# Altium PCB EEG_PCB.PcbDoc (part 1 of 2)
Units mm, origin at the board's own origin, x right, y up, seen from the top; angles counter-clockwise.
Board outline 44 x 34 mm, 4 copper layers (Top Layer, Internal Plane 1, Internal Plane 2, Bottom Layer), stack 0.778 mm thick; 60 components, 61 nets, 284 pads, 106 vias.
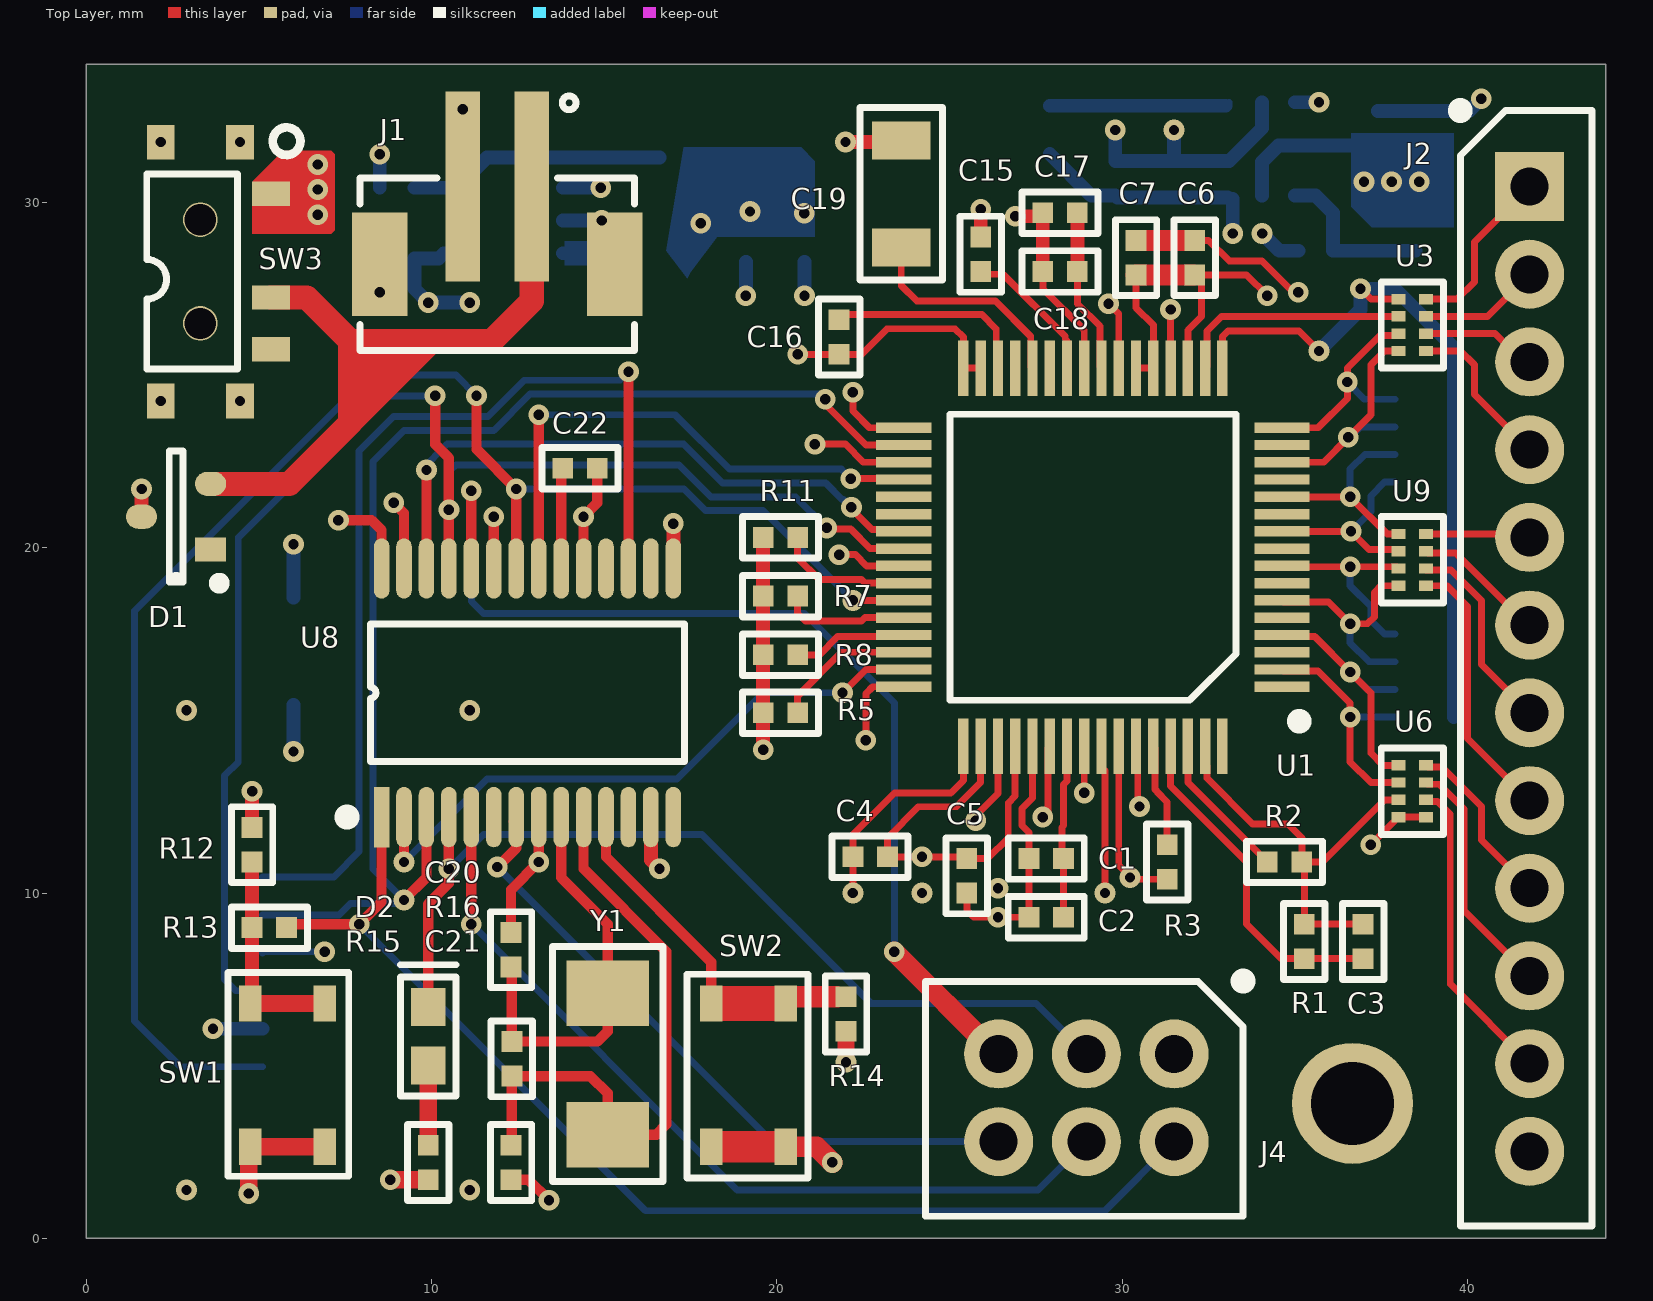
[diagram p0: Top Layer view]
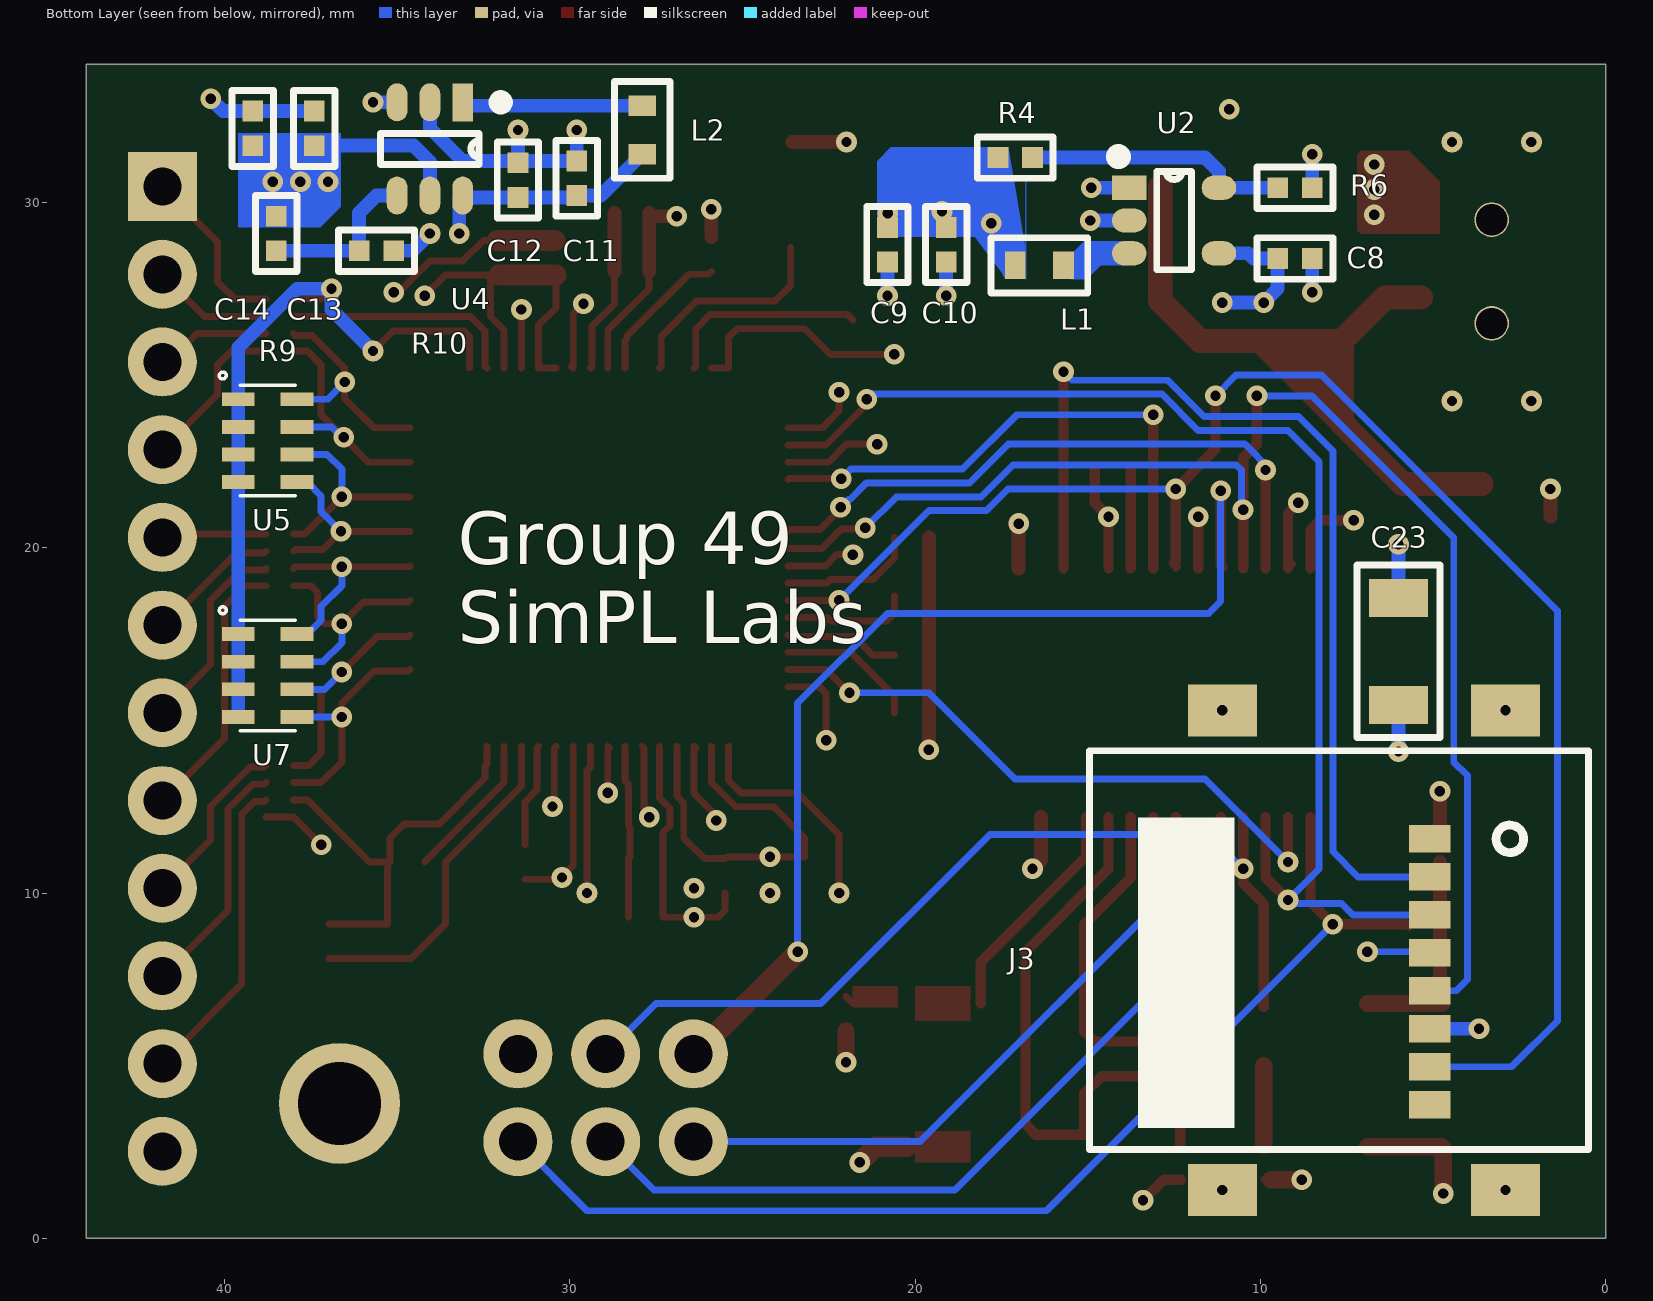
[diagram p1: Bottom Layer view, seen from below]
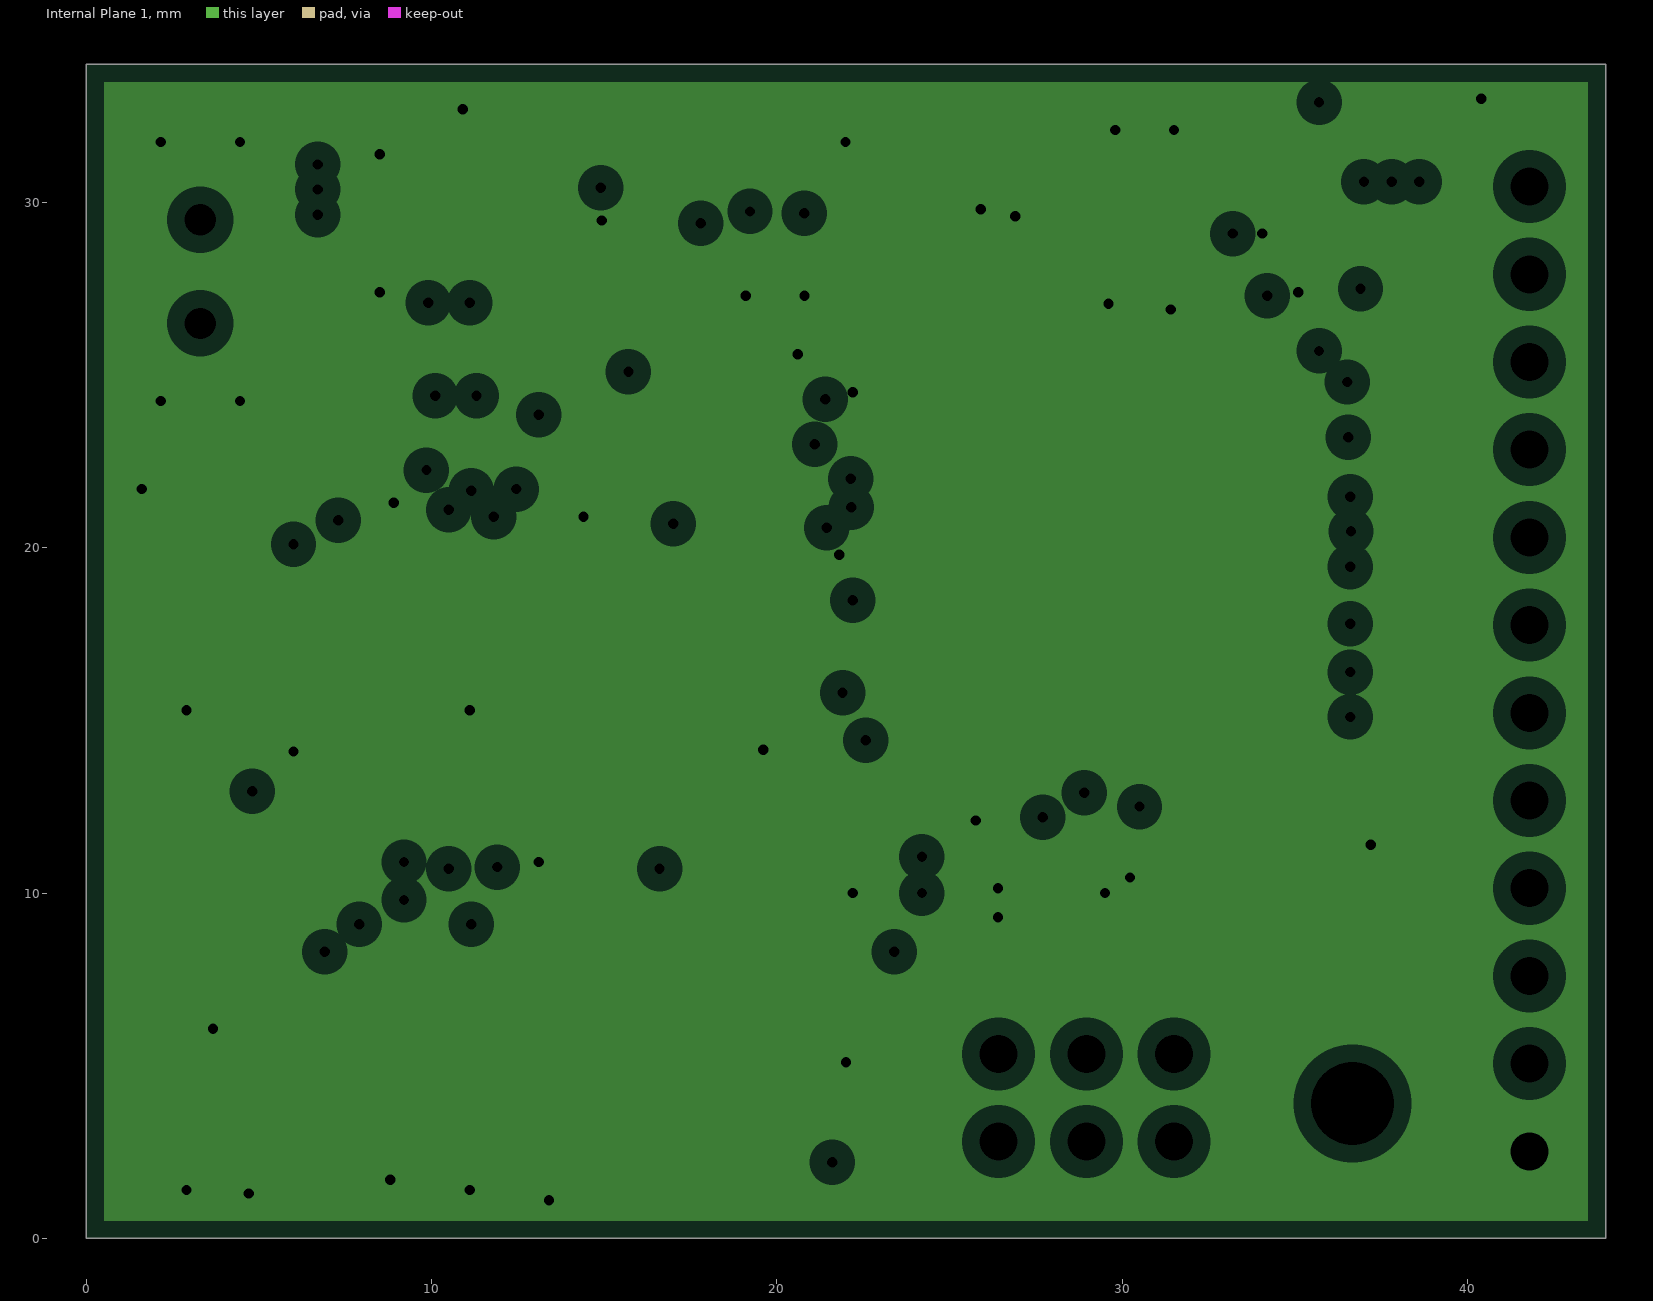
[diagram p2: Internal Plane 1, clearances drawn from the general rule]
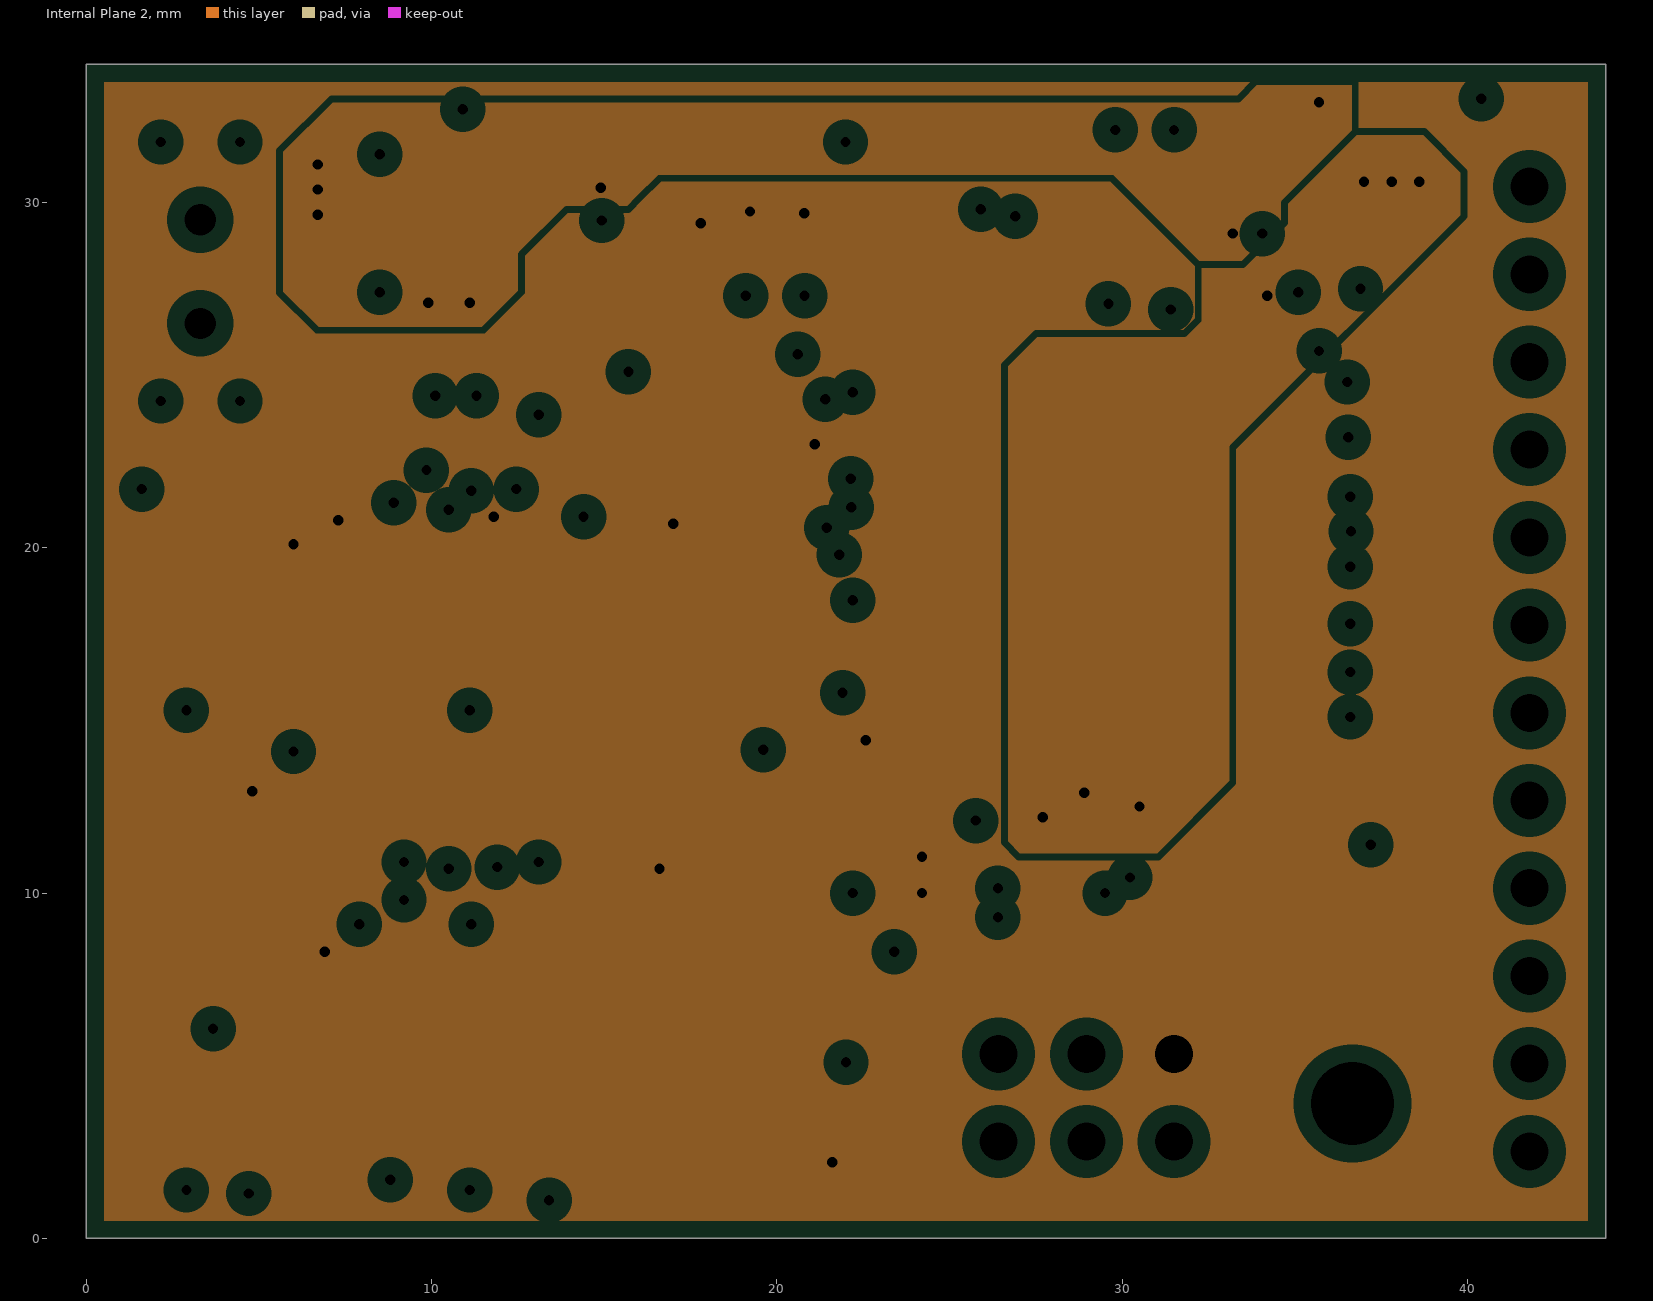
[diagram p3: Internal Plane 2, clearances drawn from the general rule]

## Layer stack, top to bottom
Top Solder: solder mask 0.0102, Solder Resist, Dk 3.5
Top Layer: signal copper 0.0356
Dielectric 1: core 0.254, FR-4, Dk 4.2
Internal Plane 1: plane copper 0.036, net GND
Dielectric 3: prepreg 0.127, Dk 4.2
Internal Plane 2: plane copper 0.036, net 3V3
Dielectric 2: core 0.254, Dk 4.2
Bottom Layer: signal copper 0.0356
Bottom Solder: solder mask 0.0102, Solder Resist, Dk 3.5

## Board outline
0,0 0,34 44,34 44,0

## Design rules (kind name [scope] priority, off if disabled: settings)
Clearance [All] p1: gap=0.2 ignorepadtopadclearanceinfootprint=FALSE
MinimumSolderMaskSliver [All] p1: minsoldermaskwidth=0.01
PlaneClearance [All] p1: clearance=0.508
PlaneConnect [All] p1: planeconnectstyle=Relief reliefexpansion=0.508 reliefentries=4 reliefconductorwidth=0.254 reliefairgap=0.254
PolygonConnect [All] p1: connectstyle=Relief reliefconductorwidth=0.254 reliefentries=4 polygonreliefangle="90 Angle" airgapwidth=0.254
RoutingVias [All] p1: holewidth=0.3 width=0.6 viastyle="Through Hole" minholewidth=0.3 minwidth=0.6 maxholewidth=0.3 maxwidth=0.6
SilkToSilkClearance [All] p1: silktosilkclearance=0.2
SilkToSolderMaskClearance [IsPad] p1: minsilkscreentomaskgap=0.1 clearancetoexposedcopper=TRUE
SolderMaskExpansion [All] p1: expansion=0.102
Width [All] p1: maxlimit=1 minlimit=0.2 preferedwidth=0.2
25 further rules are at their usual default settings.

## Components (designator, comment, footprint, x,y, rotation, side; value= is the part's Value field where it differs from the comment)
C1 "1uF_Cap" 0402RESISTOR 27.8,11 r0 top value=1uF
C2 "0.1uF_Cap" 0402RESISTOR 27.8,9.3 r0 top value=0.1uF
C3 "1.5nF_Cap" 0402RESISTOR 36.975,8.6 r90 top value=1.5nF
C4 "1uF_Cap" 0402RESISTOR 22.7,11.05 r0 top value=1uF
C5 "0.1uF_Cap" 0402RESISTOR 25.5,10.5 r90 top value=0.1uF
C6 "1uF_Cap" 0402RESISTOR 32.1,28.4 r270 top value=1uF
C7 "0.1uF_Cap" 0402RESISTOR 30.4,28.4 r270 top value=0.1uF
C8 "4.7uF_Cap" 0402RESISTOR 9,28.377 r0 bottom value=4.7uF
C9 "10uF_Cap" 0402RESISTOR 20.8,28.777 r90 bottom value=10uF
C10 "0.1uF_Cap" 0402RESISTOR 19.1,28.777 r90 bottom value=0.1uF
C11 "10uF_Cap" 0402RESISTOR 29.8,30.7 r270 bottom value=10uF
C12 "0.1uF_Cap" 0402RESISTOR 31.5,30.646 r270 bottom value=0.1uF
C13 "4.7uF_Cap" 0402RESISTOR 37.4,32.146 r270 bottom value=4.7uF
C14 "4.7uF_Cap" 0402RESISTOR 39.18,32.146 r270 bottom value=4.7uF
C15 "1uF_Cap" 0402RESISTOR 25.9,28.5 r270 top value=1uF
C16 "1uF_Cap" 0402RESISTOR 21.8,26.1 r90 top value=1uF
C17 "10uF_Cap" 0402RESISTOR 28.2,29.7 r180 top value=10uF
C18 "0.1uF_Cap" 0402RESISTOR 28.2,28 r180 top value=0.1uF
C19 "100uF_Cap" 1206RESISTOR 23.6,30.25 r270 top value=100uF
C20 "18pF_Cap" 0402RESISTOR 12.3,8.36 r270 top value=18pF
C21 "18pF_Cap" 0402RESISTOR 12.3,2.2 r90 top value=18pF
C22 "10uF_Cap" 0402RESISTOR 14.3,22.3 r180 top value=10uF
C23 "100uF_Cap" 1206RESISTOR 6,17 r90 bottom value=100uF
D1 "TVS 4.0 VRWM" SOT23-3_TVS 3.6,19.95 r180 top
D2 "LED1" LED 9.9,5.85 r270 top
J1 "CONN HEADER SMD 2POS 2MM" Battery_Conn 11.9,30.46 r180 top
J2 "CONN HEADER VERT 2X6 2.54MM" HDR1X12 41.8,30.46 r0 top
J3 "MICROSD CONNECTOR" SD_Conn 14.95,1.545 r90 bottom
J4 "CONN HEADER VERT 6POS 2.54MM" 6PIN_HEADER 31.5,5.34 r270 top
L1 "2_2uH_Inductor" 0603INDUCTOR 16.4,28.177 r0 bottom value=2.2uH
L2 "4_7uH_Inductor" 0603INDUCTOR 27.9,32.1 r90 bottom value=4.7uH
R1 "1M_Res" 0402RESISTOR 35.275,8.6 r90 top value=1M
R2 "0_Res" 0402RESISTOR 34.7,10.9 r0 top value=0R
R3 "0_Res" 0402RESISTOR 31.3,10.9 r270 top value=0R
R4 "453k_Res" 0402RESISTOR 17.1,31.3 r0 bottom value=453k
R5 "100k_Res" 0402RESISTOR 20.1,15.22 r180 top value=100k
R6 "100k_Res" 0402RESISTOR 9,30.427 r0 bottom value=100k
R7 "100k_Res" 0402RESISTOR 20.1,18.6 r180 top value=100k
R8 "100k_Res" 0402RESISTOR 20.1,16.9 r180 top value=100k
R9 "1_6M_Res" 0402RESISTOR 38.5,29.1 r90 bottom value=1.6M
R10 "180k_Res" 0402RESISTOR 35.6,28.6 r0 bottom value=180k
R11 "100k_Res" 0402RESISTOR 20.1,20.3 r0 top value=100k
R12 "10k_Res" 0402RESISTOR 4.8,11.4 r90 top value=10k
R13 "1k_Res" 0402RESISTOR 5.3,9 r180 top value=1k
R14 "470k_Res" 0402RESISTOR 22,6.5 r90 top value=470k
R15 "1k_Res" 0402RESISTOR 9.9,2.2 r90 top value=1k
R16 "1M_Res" 0402RESISTOR 12.325,5.2 r90 top value=1M
SW1 "SWITCH TACTILE SPST-NO 0.05A 16V" BasicTwoPinSwitch 6.9,6.8 r270 top
SW2 "SWITCH TACTILE SPST-NO 0.05A 16V" BasicTwoPinSwitch 18.1,2.65 r90 top
SW3 "MINI SPDT SWITCH" SW_SPDT 2.275,24.025 r90 top
U1 "ADS1299IPAGR AFE" 64-TQFP 34.625,15.975 r180 top
U2 "AP3417C BUCK" SOT23_BUCK 13.8,30.427 r180 bottom
U3 "RES ARRAY 4 RES 1.6K OHM 0804" Rarray 38.4,27.2 r0 top
U4 "TPS61073 Boost" SOT23-6 33.1,32.9 r270 bottom
U5 "CAP ARRAY 1000PF 50V X7R 0612" Cap_array 38.75,23.1 r180 bottom
U6 "RES ARRAY 4 RES 1.6K OHM 0804" Rarray 38.4,13.7 r0 top
U7 "CAP ARRAY 1000PF 50V X7R 0612" Cap_array 38.75,16.3 r180 bottom
U8 "PIC32MX250F128B MCU" SSOP28 8.55,12.2 r90 top
U9 "RES ARRAY 4 RES 1.6K OHM 0804" Rarray 38.4,20.4 r0 top
Y1 "XTAL" 3X5MM_XTAL 15.1,5.05 r270 top

## Footprints (in the part's own frame and the unit in brackets; to place one, negate y for a bottom-side part, rotate by r counter-clockwise, add the part's x,y. Pads: shape width x height; smd on the part's side, far side on the other; paste and mask are expansions set on the pad)
3X5MM_XTAL [mm]
  rect 1.9x2.4 smd: 1(-2.05,0) 2(2.05,0)
  silkscreen extent -3.4,-1.6 3.4,1.6
6PIN_HEADER [mm]
  round 2 hole 1.1: 1(0,0) 2(2.54,0) 3(0,-2.54) 4(2.54,-2.54) 5(0,-5.08) 6(2.54,-5.08)
  silkscreen extent -2.12,-7.2 4.7,2.01
64-TQFP [mm]
  rect 1.6x0.3 smd mask+0.05: 1(0,0) 2(0,-0.5) 3(0,-1) 4(0,-1.5) 5(0,-2) 6(0,-2.5) 7(0,-3) 8(0,-3.5) 9(0,-4) 10(0,-4.5) 11(0,-5) 12(0,-5.5) 13(0,-6) 14(0,-6.5) 15(0,-7) 16(0,-7.5) 33(10.95,-7.5) 34(10.95,-7) 35(10.95,-6.5) 36(10.95,-6) 37(10.95,-5.5) 38(10.95,-5) 39(10.95,-4.5) 40(10.95,-4) 41(10.95,-3.5) 42(10.95,-3) 43(10.95,-2.5) 44(10.95,-2) 45(10.95,-1.5) 46(10.95,-1) 47(10.95,-0.5) 48(10.95,0)
  rect 0.3x1.6 smd mask+0.05: 17(1.725,-9.225) 18(2.225,-9.225) 19(2.725,-9.225) 20(3.225,-9.225) 21(3.725,-9.225) 22(4.225,-9.225) 23(4.725,-9.225) 24(5.225,-9.225) 25(5.725,-9.225) 26(6.225,-9.225) 27(6.725,-9.225) 28(7.225,-9.225) 29(7.725,-9.225) 30(8.225,-9.225) 31(8.725,-9.225) 32(9.225,-9.225) 49(9.225,1.725) 50(8.725,1.725) 51(8.225,1.725) 52(7.725,1.725) 53(7.225,1.725) 54(6.725,1.725) 55(6.225,1.725) 56(5.725,1.725) 57(5.225,1.725) 58(4.725,1.725) 59(4.225,1.725) 60(3.725,1.725) 61(3.225,1.725) 62(2.725,1.725) 63(2.225,1.725) 64(1.725,1.725)
  silkscreen extent -0.51,-7.89 9.61,1.01, body extent -0.6,-9.9 11.6,2.3, height 1.2
0402RESISTOR [mm]
  rect 0.6x0.6 smd mask+0.08: 1(-0.5,0) 2(0.5,0)
  silkscreen extent -1.1,-0.6 1.1,0.6
0603INDUCTOR [mm]
  rect 0.6x0.8 smd: 1(-0.7,0) 2(0.7,0)
  silkscreen extent -1.4,-0.8 1.4,0.8
1206RESISTOR [mm]
  rect 1.1x1.7 smd: 1(-1.55,0) 2(1.55,0)
  silkscreen extent -2.5,-1.2 2.5,1.2
BasicTwoPinSwitch [mm]
  rect 1.05x0.65 smd: 1(0,0) 2(0,-2.15) 3(4.15,-2.15) 4(4.15,0)
  silkscreen extent -0.9,-2.8 5,0.7, body extent -0.25,-2.65 4.35,0.55, height 2.71
Battery_Conn [mm]
  rect 1x5.5 smd: 1(-1,0) 2(1,0)
  rect 1.6x3 smd: 3(-3.4,2.25) 4(3.4,2.25)
  silkscreen extent -3.98,-2.62 3.98,4.75, body extent -3.98,-2.25 3.97,4.75, height 6.61
Cap_array [mm]
  rect 0.95x0.4 smd: 1(-0.85,1.2) 3(-0.85,-0.4) 4(-0.85,-1.2) 5(0.85,-1.2) 6(0.85,-0.4) 7(0.85,0.4) 8(0.85,1.2)
  rect 0.95x0.4 smd mask+0.102: 2(-0.85,0.4)
  silkscreen extent -1.4,-1.6 0.8,1.99
HDR1X12 [mm]
  rect 2x2 hole 1.1: 1(0,0)
  round 2 hole 1.1: 2(0,-2.54) 3(0,-5.08) 4(0,-7.62) 5(0,-10.16) 6(0,-12.7) 7(0,-15.24) 8(0,-17.78) 9(0,-20.32) 10(0,-22.86) 11(0,-25.4) 12(0,-27.94)
  silkscreen extent -2.02,-30.1 1.8,2.21
LED [mm]
  rect 1.1x1 smd: 1(-0.85,0) 2(0.85,0)
  silkscreen extent -2.07,-0.8 1.73,0.8, body extent -0.8,-0.4 0.8,0.4, height 0.66
Rarray [mm]
  rect 0.4x0.3 smd mask+0.05: 1(-0.4,0) 2(-0.4,-0.5) 3(-0.4,-1) 4(-0.4,-1.5) 5(0.4,-1.5) 6(0.4,-1) 7(0.4,-0.5) 8(0.4,0)
  silkscreen extent -0.9,-2 0.9,0.5, body extent -0.5,-1.75 0.5,0.25, height 0.56
SD_Conn [mm]
  rect 0.8x1.2 smd: 1(10.025,-9.85) 2(8.925,-9.85) 3(7.825,-9.85) 4(6.725,-9.85) 5(5.625,-9.85) 6(4.525,-9.85) 7(3.425,-9.85) 8(2.325,-9.85)
  rect 1.5x2 smd: 9(-0.145,-12.05) 10(-0.145,-3.85) 11(13.745,-3.85) 12(13.745,-12.05)
  silkscreen extent 1.02,-14.45 12.57,0, body extent 7,-6.8 7,-6.8, height 0.25
SOT23-3_TVS [mm]
  rect 0.9x0.7 smd: 1(0,0)
  oval 0.9x0.7 smd: 2(0,-1.9) 3(2,-0.95)
  silkscreen extent -0.3,-2.85 1.2,1.02
SOT23-6 [mm]
  rect 1.1x0.6 smd: 1(0,0)
  oval 1.1x0.6 smd: 2(0,-0.95) 3(0,-1.9) 4(2.7,-1.9) 5(2.7,-0.95) 6(2.7,0)
  silkscreen extent -0.1,-2.38 1.8,1.2, body extent 0.15,-2.35 2.57,0.44, height 1.09
SOT23_BUCK [mm]
  rect 1x0.7 smd mask+0.08: 1(0,0)
  oval 1x0.7 smd mask+0.08: 2(0,-0.95) 3(0,-1.9) 4(2.6,-1.9) 5(2.6,0)
  silkscreen extent -0.32,-2.38 1.8,0.91
SSOP28 [mm]
  rect 1.75x0.45 smd mask+0.05: 1(0,0)
  oval 1.75x0.45 smd mask+0.05: 2(0,-0.65) 3(0,-1.3) 4(0,-1.95) 5(0,-2.6) 6(0,-3.25) 7(0,-3.9) 8(0,-4.55) 9(0,-5.2) 10(0,-5.85) 11(0,-6.5) 12(0,-7.15) 13(0,-7.8) 14(0,-8.45) 15(7.2,-8.45) 16(7.2,-7.8) 17(7.2,-7.15) 18(7.2,-6.5) 19(7.2,-5.85) 20(7.2,-5.2) 21(7.2,-4.55) 22(7.2,-3.9) 23(7.2,-3.25) 24(7.2,-2.6) 25(7.2,-1.95) 26(7.2,-1.3) 27(7.2,-0.65) 28(7.2,0)
  silkscreen extent -0.01,-8.78 5.59,1.01, body extent -0.5,-9.44 7.7,1.05, height 2.01
SW_SPDT [mm]
  rect 0.7x1.1 smd: 1(6.225,-3.075) 2(3.225,-3.075) 3(1.725,-3.075)
  rect 1x0.8 smd: 4(0.225,-2.175) 5(0.225,0.125) 6(7.725,0.125) 7(7.725,-2.175)
  round 1 hole 0.9 unplated: 8(2.475,-1.025) 9(5.475,-1.025)
  silkscreen extent 1.15,-3.93 8.15,0.53, body extent 0.15,-3.27 7.85,1.86, height 1.4

## Part data
C1 C4 C6 C15 C16: "0402 Cap 1uF", Capacitance=1uF, Case/Package=0402, Case Code (Metric)=1005, Dielectric=X5R, Manufacturer=Murata, Manufacturer Part Number=GRM153R61A105ME95D, Max Operating Temperature=85°C, Min Operating Temperature=-55°C, Package Quantity=10000, Supplier Part Number 1=490-14577-6-ND, Tolerance=20%, Voltage Rating=10V, Case Code (Imperial)=0402, ComponentLink1Description=http://www.farnell.com/datasheets/1666664.pdf?src-supplier=Element14, ComponentLink1URL=http://www.farnell.com/datasheets/1666664.pdf?src-supplier=Element14, Composition=Ceramic, Height=0.3mm, Length=1mm, Material=Ceramic, Mount="Surface Mount", Packaging="Tape and Reel", Pricing 1="1=0.19, 10=0.131, 100=0.0663, 500=0.04538, 1000=0.04015, 2500=0.0384, 5000=0.03491 (USD)", REACH SVHC="No SVHC", Stock 1=43822, Supplier 1=Digi-Key, Termination=SMD/SMT, Thickness=0.013inch, Voltage Rating (DC)=10V, Weight=0.000212oz, Width=0.5mm
C2 C5 C7 C10 C12 C18: "0402 Cap 0.1uF", Capacitance=100nF, Case/Package=0402, Case Code (Metric)=1005, Dielectric=X5R, Manufacturer=Samsung, Manufacturer Part Number=CL05A104KP5NNNC, Max Operating Temperature=85°C, Min Operating Temperature=-55°C, Supplier Part Number 1=1276-1022-6-ND, Tolerance=10%, Voltage Rating=10V, Case Code (Imperial)=0402, ComponentLink1Description=https://media.digikey.com/pdf/Data%20Sheets/Samsung%20PDFs/CL_Series_MLCC_ds.pdf?src-supplier=Digi-Key, ComponentLink1URL=https://media.digikey.com/pdf/Data%20Sheets/Samsung%20PDFs/CL_Series_MLCC_ds.pdf?src-supplier=Digi-Key, ComponentLink2Description=https://www.verical.com/server-webapp/html/getDatasheet?partID=358611&src-supplier=Verical, ComponentLink2URL=https://www.verical.com/server-webapp/html/getDatasheet?partID=358611&src-supplier=Verical, ComponentLink3Description=http://www1.futureelectronics.com/doc/SAMSUNG%20PASSIVE/CL05B104KQ5NNNC.pdf?src-supplier=Future+Electronics, ComponentLink3URL=http://www1.futureelectronics.com/doc/SAMSUNG%20PASSIVE/CL05B104KQ5NNNC.pdf?src-supplier=Future+Electronics, ComponentLink4Description=https://www.distrelec.biz/Web/Downloads/_e/ng/MLCC_CatalogDownload2013_ENG.pdf?mime=application%2Fpdf&src-supplier=Distrelec, ComponentLink4URL=https://www.distrelec.biz/Web/Downloads/_e/ng/MLCC_CatalogDownload2013_ENG.pdf?mime=application%2Fpdf&src-supplier=Distrelec, Contact Plating=Tin, Depth=0.5mm, Height=0.5mm, Length=1mm, Mount="Surface Mount", Packaging="Tape and Reel", Pricing 1="1=0.1, 10=0.025, 100=0.0111, 500=0.00794, 1000=0.00624, 2500=0.00568, 5000=0.00522 (USD)", Radiation Hardening=No, Stock 1=12307534, Supplier 1=Digi-Key, Thickness=0.022inch, Width=0.02inch
C3: "0402 Cap 1.5nF", Capacitance=1.5nF, Case/Package=0402, Case Code (Metric)=1005, Dielectric=X7R, Manufacturer=Samsung, Manufacturer Part Number=CL05B152KB5NNNC, Max Operating Temperature=125°C, Min Operating Temperature=-55°C, Package Quantity=1, Supplier Part Number 1=1276-1521-6-ND, Tolerance=10%, Voltage=50V, Case Code (Imperial)=0402, ComponentLink1Description=https://www.verical.com/server-webapp/html/getDatasheet?partID=543173&src-supplier=Verical, ComponentLink1URL=https://www.verical.com/server-webapp/html/getDatasheet?partID=543173&src-supplier=Verical, ComponentLink2Description=http://www1.futureelectronics.com/doc/SAMSUNG/CL05B152KB5NNNC.pdf?src-supplier=Future+Electronics, ComponentLink2URL=http://www1.futureelectronics.com/doc/SAMSUNG/CL05B152KB5NNNC.pdf?src-supplier=Future+Electronics, ComponentLink3Description=https://www.distrelec.biz/Web/Downloads/_e/ng/MLCC_CatalogDownload2013_ENG.pdf?mime=application%2Fpdf&src-supplier=Distrelec, ComponentLink3URL=https://www.distrelec.biz/Web/Downloads/_e/ng/MLCC_CatalogDownload2013_ENG.pdf?mime=application%2Fpdf&src-supplier=Distrelec, ComponentLink4Description=https://produktinfo.conrad.com/datenblaetter/450000-474999/459134-da-01-en-VS_KONDENSATOR_0402.pdf?src-supplier=Conrad, ComponentLink4URL=https://produktinfo.conrad.com/datenblaetter/450000-474999/459134-da-01-en-VS_KONDENSATOR_0402.pdf?src-supplier=Conrad, Contact Plating=Tin, Depth=0.5mm, Height=0.5mm, Length=1mm, Material=Ceramic, Mount="Surface Mount", Packaging="Tape and Reel", Pricing 1="1=0.1, 10=0.023, 100=0.0101, 500=0.0072, 1000=0.00566, 2500=0.00514, 5000=0.00473 (USD)", Radiation Hardening=No, Stock 1=658330, Supplier 1=Digi-Key, Thickness=0.022inch, Voltage Rating=50V, Width=0.02inch
C8 C13 C14: "0402 Cap 4.7uF", Capacitance=4.7uF, Case/Package=0402, Case Code (Metric)=1005, Manufacturer=Murata, Manufacturer Part Number=GRM155R61A475MEAAD, Max Operating Temperature=85°C, Min Operating Temperature=-55°C, Supplier Part Number 1=490-14306-6-ND, Tolerance=20%, Voltage Rating=10V, Case Code (Imperial)=0402, ComponentLink1Description=http://www.farnell.com/datasheets/2189109.pdf?src-supplier=Farnell, ComponentLink1URL=http://www.farnell.com/datasheets/2189109.pdf?src-supplier=Farnell, ComponentLink2Description=https://search.murata.co.jp/Ceramy/image/img/A01X/G101/ENG/GRM155R61A475MEAA-01.pdf?src-supplier=Digi-Key, ComponentLink2URL=https://search.murata.co.jp/Ceramy/image/img/A01X/G101/ENG/GRM155R61A475MEAA-01.pdf?src-supplier=Digi-Key, ComponentLink3Description=http://www.farnell.com/datasheets/2189109.pdf?src-supplier=Element14, ComponentLink3URL=http://www.farnell.com/datasheets/2189109.pdf?src-supplier=Element14, ComponentLink4Description=http://www.farnell.com/datasheets/2189109.pdf?src-supplier=Newark, ComponentLink4URL=http://www.farnell.com/datasheets/2189109.pdf?src-supplier=Newark, ComponentLink5Description=http://datasheet.octopart.com/GRM155R61A475MEAAD-Murata-datasheet-138740730.pdf?src-supplier=Ciiva+Crawler, ComponentLink5URL=http://datasheet.octopart.com/GRM155R61A475MEAAD-Murata-datasheet-138740730.pdf?src-supplier=Ciiva+Crawler, ComponentLink6Description=http://datasheet.octopart.com/GRM155R61A475MEAAD-Murata-datasheet-68589269.pdf?src-supplier=Newark, ComponentLink6URL=http://datasheet.octopart.com/GRM155R61A475MEAAD-Murata-datasheet-68589269.pdf?src-supplier=Newark, ComponentLink7Description=http://datasheet.octopart.com/GRM155R61A475MEAAD-Murata-datasheet-8819587.pdf, ComponentLink7URL=http://datasheet.octopart.com/GRM155R61A475MEAAD-Murata-datasheet-8819587.pdf, ComponentLink8Description=http://datasheet.octopart.com/GRM155R61A475MEAAD-Murata-datasheet-10025737.pdf, ComponentLink8URL=http://datasheet.octopart.com/GRM155R61A475MEAAD-Murata-datasheet-10025737.pdf, ComponentLink9Description=http://datasheet.octopart.com/GRM155R61A475MEAAD-Murata-datasheet-11978611.pdf, ComponentLink9URL=http://datasheet.octopart.com/GRM155R61A475MEAAD-Murata-datasheet-11978611.pdf, ComponentLink10Description=http://datasheet.octopart.com/GRM155R61A475MEAAD-Murata-datasheet-12510076.pdf, ComponentLink10URL=http://datasheet.octopart.com/GRM155R61A475MEAAD-Murata-datasheet-12510076.pdf, ComponentLink11Description=http://datasheet.octopart.com/GRM155R61A475MEAAD-Murata-datasheet-12515295.pdf, ComponentLink11URL=http://datasheet.octopart.com/GRM155R61A475MEAAD-Murata-datasheet-12515295.pdf, Mount="Surface Mount", Packaging="Tape and Reel", Pricing 1="1=0.25, 10=0.169, 100=0.0856, 500=0.05854, 1000=0.05179, 2500=0.04954, 5000=0.04503 (USD)", Stock 1=848000, Supplier 1=Digi-Key
C9 C11 C17 C22: "0402 Cap 10uF", Capacitance=10uF, Case/Package=0402, Case Code (Metric)=1005, Dielectric=X5R, Manufacturer=Samsung, Manufacturer Part Number=CL05A106MP5NUNC, Max Operating Temperature=85°C, Min Operating Temperature=-55°C, Package Quantity=1, Supplier Part Number 1=1276-1450-6-ND, Tolerance=20%, Voltage Rating=10V, Case Code (Imperial)=0402, ComponentLink1Description=https://media.digikey.com/pdf/Data%20Sheets/Samsung%20PDFs/CL_Series_MLCC_ds.pdf?src-supplier=Digi-Key, ComponentLink1URL=https://media.digikey.com/pdf/Data%20Sheets/Samsung%20PDFs/CL_Series_MLCC_ds.pdf?src-supplier=Digi-Key, ComponentLink2Description=https://www.verical.com/server-webapp/html/getDatasheet?partID=745310&src-supplier=Verical, ComponentLink2URL=https://www.verical.com/server-webapp/html/getDatasheet?partID=745310&src-supplier=Verical, Contact Plating=Tin, Depth=0.5mm, Lead Free="Lead Free", Length=1mm, Mount="Surface Mount", Packaging="Tape and Reel", Pricing 1="1=0.42, 10=0.295, 100=0.1943, 500=0.14392, 1000=0.12233, 2500=0.11514, 5000=0.10794 (USD)", Radiation Hardening=No, Stock 1=3276370, Supplier 1=Digi-Key, Termination=Wraparound, Thickness=0.028inch, Width=0.02inch
C19 C23: "1206 Cap 100uF", Capacitance=100uF, Case/Package=1206, Case Code (Metric)=3216, Dielectric=X5R, Manufacturer=Murata, Manufacturer Part Number=GRM31CR60J107ME39L, Max Operating Temperature=85°C, Min Operating Temperature=-55°C, Package Quantity=1, Supplier Part Number 1=490-4539-6-ND, Tolerance=20%, Voltage=6.3V, Case Code (Imperial)=1206, ComponentLink1Description=http://uk.rs-online.com/webdocs/1388/0900766b813885c5.pdf?src-supplier=RSComponents, ComponentLink1URL=http://uk.rs-online.com/webdocs/1388/0900766b813885c5.pdf?src-supplier=RSComponents, ComponentLink2Description=http://components.arrow.com/part/dataview/42788059S8888100N2606?src-supplier=Arrow, ComponentLink2URL=http://components.arrow.com/part/dataview/42788059S8888100N2606?src-supplier=Arrow, ComponentLink3Description=http://www.mouser.com/ds/2/281/c02e-2905.pdf?src-supplier=Mouser, ComponentLink3URL=http://www.mouser.com/ds/2/281/c02e-2905.pdf?src-supplier=Mouser, ComponentLink4Description=https://www.murata.com/~/media/webrenewal/support/library/catalog/products/capacitor/mlcc/c02e.ashx?la=en-us&src-supplier=Digi-Key, ComponentLink4URL=https://www.murata.com/~/media/webrenewal/support/library/catalog/products/capacitor/mlcc/c02e.ashx?la=en-us&src-supplier=Digi-Key, ComponentLink5Description=http://psearch.murata.com/capacitor/product/GRM31CF51A226ZE01%23.pdf?src-supplier=Future+Electronics, ComponentLink5URL=http://psearch.murata.com/capacitor/product/GRM31CF51A226ZE01%23.pdf?src-supplier=Future+Electronics, ComponentLink6Description=https://www.distrelec.biz/Web/Downloads/_t/ds/murata_MLCC_eng_tds.pdf?mime=application%2Fpdf&src-supplier=Distrelec, ComponentLink6URL=https://www.distrelec.biz/Web/Downloads/_t/ds/murata_MLCC_eng_tds.pdf?mime=application%2Fpdf&src-supplier=Distrelec, ComponentLink7Description=http://www.produktinfo.conrad.com/datenblaetter/450000-474999/454804-da-01-en-VS_KONDENSATOR_1206.pdf?src-supplier=Conrad, ComponentLink7URL=http://www.produktinfo.conrad.com/datenblaetter/450000-474999/454804-da-01-en-VS_KONDENSATOR_1206.pdf?src-supplier=Conrad, ComponentLink8Description=http://www.produktinfo.conrad.com/datenblaetter/450000-474999/451152-da-01-de-VS_CHIP_KOND_1206_100_0_UF_20Pr_6_3V_X5R.pdf?src-supplier=Conrad, ComponentLink8URL=http://www.produktinfo.conrad.com/datenblaetter/450000-474999/451152-da-01-de-VS_CHIP_KOND_1206_100_0_UF_20Pr_6_3V_X5R.pdf?src-supplier=Conrad, Depth=1.6mm, Height=1.6mm, Lead Free="Lead Free", Length=3.2mm, Material=Ceramic, Mount="Surface Mount", Packaging="Tape and Reel", Pricing 1="1=1.08, 10=0.852, 100=0.6386, 500=0.48254, 1000=0.42577 (USD)", Radiation Hardening=No, REACH SVHC="No SVHC", Stock 1=1307168, Supplier 1=Digi-Key, Termination=SMD/SMT, Thickness=0.071inch, Voltage Rating=6.3V, Voltage Rating (DC)=6.3V, Width=1.6mm
C20 C21: "0402 Cap 18pF", Manufacturer=KEMET, Manufacturer Part Number=C0402C180K5RAC7867, Supplier Part Number 1=399-19371-6-ND, ComponentLink1Description="digikey link", ComponentLink1URL=https://www.digikey.ca/product-detail/en/kemet/C0402C180K5RAC7867/399-19371-1-ND/9694278, Pricing 1="1=0.21, 10=0.142, 100=0.0721, 500=0.04934, 1000=0.04364, 2500=0.04174, 5000=0.03795 (USD)", Stock 1=3569, Supplier 1=Digi-Key
D1: library part GSOT04C-G3-08, "TVS Diode Arrays 4.0 Volt 300 Watt Common Anode", Breakdown Voltage=6.1V, Capacitance=200pF, Case/Package=TO-236-3, Clamping Voltage=14.3V, Manufacturer="Vishay Semiconductors", Max Operating Temperature=150°C, Min Breakdown Voltage=5V, Min Operating Temperature=-55°C, Peak Pulse Current=30A, Peak Pulse Power=429W, Power Line Protection=No, Reverse Standoff Voltage=4V, Supplier Part Number 1=GSOT04C-G3-08GIDKR-ND, ComponentLink1Description=http://www.mouser.com/ds/2/427/gsot03c-243311.pdf?src-supplier=Mouser, ComponentLink1URL=http://www.mouser.com/ds/2/427/gsot03c-243311.pdf?src-supplier=Mouser, ComponentLink2Description=http://www.vishay.com/docs/85824/gsot03c.pdf?src-supplier=Digi-Key, ComponentLink2URL=http://www.vishay.com/docs/85824/gsot03c.pdf?src-supplier=Digi-Key, Composition=Zener, Manufacturer Part Number=GSOT04C-G3-08, Mount="Surface Mount", Number of Channels=2, Number of Unidirectional Channels=2, Packaging="Tape and Reel", Polarity=Bidirectional, Pricing 1="1=0.43, 10=0.324, 25=0.2916, 100=0.1538, 250=0.15224, 500=0.13634, 1000=0.1061 (USD)", Stock 1=3725, Supplier 1=Digi-Key, Termination=SMD/SMT, Weight=0.00031oz
D2: "LED BLUE CLEAR CHIP SMD", Case/Package=0603, Case Code (Metric)=1608, Color=Blue, Forward Current=20mA, Forward Voltage=2.8V, Lens Color=Colorless, Manufacturer="Vishay Lite-On", Manufacturer Part Number=LTST-C193TBKT-5A, Max Operating Temperature=80°C, Min Operating Temperature=-20°C, Package Quantity=1, Power Dissipation=76mW, Reverse Voltage=5V, Supplier Part Number 1=160-1827-1-ND, Test Current=5mA, Case Code (Imperial)=0603, ComponentLink1Description=http://www.mouser.com/ds/2/239/Lite-On-LTST-C193TBKT-5A-187386.pdf?src-supplier=Mouser, ComponentLink1URL=http://www.mouser.com/ds/2/239/Lite-On-LTST-C193TBKT-5A-187386.pdf?src-supplier=Mouser, ComponentLink2Description=https://media.digikey.com/pdf/Data%20Sheets/Lite-On%20PDFs/LTST-C193TBKT-5A.pdf?src-supplier=Digi-Key, ComponentLink2URL=https://media.digikey.com/pdf/Data%20Sheets/Lite-On%20PDFs/LTST-C193TBKT-5A.pdf?src-supplier=Digi-Key, ComponentLink3Description=https://www.verical.com/server-webapp/html/getDatasheet?partID=293056&src-supplier=Verical, ComponentLink3URL=https://www.verical.com/server-webapp/html/getDatasheet?partID=293056&src-supplier=Verical, ComponentLink4Description=http://uk.rs-online.com/webdocs/0dc0/0900766b80dc0554.pdf?src-supplier=RSComponents, ComponentLink4URL=http://uk.rs-online.com/webdocs/0dc0/0900766b80dc0554.pdf?src-supplier=RSComponents, ComponentLink5Description=http://www1.futureelectronics.com/doc/LITE-ON/LTST-C193TBKT-5A.pdf?src-supplier=Future+Electronics, ComponentLink5URL=http://www1.futureelectronics.com/doc/LITE-ON/LTST-C193TBKT-5A.pdf?src-supplier=Future+Electronics, Depth=0.8mm, Dominant Wavelength=475nm, Height=0.35mm, Illumination Color=Blue, LatestRevisionDate=08-Jul-2005, LatestRevisionNote="Mech Layer 1 removed.", Lead Free="Lead Free", Length=1.6mm, Lens Style=Diffused,Colorless,Rectangular,Clear, Lens Transparency=Clear, Luminous Intensity=15mcd, Mount="Surface Mount", Number of Elements=1, Number of LEDs=1, Number of Pins=2, PackageDescription="LED; 2 Leads", PackageReference=LED-1, Packaging="Tape and Reel", Pricing 1="1=0.45, 10=0.32, 100=0.1424, 500=0.09968, 1000=0.08188, 2500=0.0712 (USD)", Published=8-Jun-2000, Publisher="Altium Limited", Radiation Hardening=No, Stock 1=40029, Supplier 1=Digi-Key, Viewing Angle=130°, Width=0.8mm
J1: library part B2B-PH-SM4-TBT(LF)(SN), Color=Natural, Manufacturer=JST, Package Quantity=1, Supplier Part Number 1=455-2872-6-ND, ComponentLink1Description=https://www.verical.com/server-webapp/html/getDatasheet?partID=473167&src-supplier=Verical, ComponentLink1URL=https://www.verical.com/server-webapp/html/getDatasheet?partID=473167&src-supplier=Verical, ComponentLink2Description=http://www.jst-mfg.com/product/pdf/eng/ePH.pdf?src-supplier=Digi-Key, ComponentLink2URL=http://www.jst-mfg.com/product/pdf/eng/ePH.pdf?src-supplier=Digi-Key, Connector Type="Male Pin", Contact Mating Length=0.13inch, Contact Plating=Tin, Fastening Type=Detent, Lead Free="Lead Free", Manufacturer Part Number=B2B-PH-SM4-TBT(LF)(SN), Mount="Surface Mount", Number of Positions=2, Number of Rows=1, Packaging="Cut Tape", Pitch=0.079inch, Pricing 1="1=0.82, 10=0.768, 100=0.5888, 500=0.51202 (USD)", Stock 1=6672, Supplier 1=Digi-Key, Termination=Solder
J2: library part 61301211121, "WURTH ELEKTRONIK         61301211121            Board-To-Board Connector, Vertical, WR-PHD Series, Through Hole, Header, 12 Contacts, 2.54 mm", Color=Black, Manufacturer="Wurth Electronics", Supplier Part Number 1=732-5323-ND, ComponentLink1Description=http://www.farnell.com/cad/1737268.pdf?src-supplier=Element14, ComponentLink1URL=http://www.farnell.com/cad/1737268.pdf?src-supplier=Element14, ComponentLink2Description=https://katalog.we-online.de/em/datasheet/6130xx11121.pdf?src-supplier=Digi-Key, ComponentLink2URL=https://katalog.we-online.de/em/datasheet/6130xx11121.pdf?src-supplier=Digi-Key, Connector Type="Male Pin", Contact Material=Copper, Contact Mating Length=0.236inch, Contact Plating=Gold, Gender=Male, Manufacturer Part Number=61301211121, Mount="Through Hole", Number of Contacts=12, Number of Positions=12, Number of Rows=1, Packaging=Bulk, Pitch=0.1inch, Pricing 1="1=0.54, 10=0.454, 25=0.3792, 50=0.316, 100=0.287, 1000=0.261 (USD)", REACH SVHC=Unknown, Stock 1=334, Supplier 1=Digi-Key, Termination=Solder
J3: library part MEM2067-02-180-00-A, "GLOBAL CONNECTOR TECHNOLOGY         MEM2067-02-180-00-A             MEMORY CARD CONNECTOR, 8 POSITION", Manufacturer="Global Connector Technology", Supplier Part Number 1=2073-MEM2067-02-180-00-ACT-ND, ComponentLink1Description=http://www.farnell.com/datasheets/1876941.pdf?src-supplier=Element14, ComponentLink1URL=http://www.farnell.com/datasheets/1876941.pdf?src-supplier=Element14, ComponentLink2Description=http://www.farnell.com/datasheets/1876941.pdf?src-supplier=Farnell, ComponentLink2URL=http://www.farnell.com/datasheets/1876941.pdf?src-supplier=Farnell, Contact Material="Copper Alloy", Contact Plating=Gold, Lead Free="Lead Free", Manufacturer Part Number=MEM2067-02-180-00-A, Mount=Socket, Number of Contacts=8, REACH SVHC="No SVHC", Stock 1=0, Supplier 1=Digi-Key
J4: library part 61300621121, "WURTH ELEKTRONIK         61300621121            Board-To-Board Connector, Vertical, WR-PHD Series, Through Hole, Header, 6 Contacts, 2.54 mm", Color=Black, Manufacturer="Wurth Electronics", Supplier Part Number 1=732-5295-ND, ComponentLink1Description=http://www.farnell.com/datasheets/1442180.pdf?src-supplier=Element14, ComponentLink1URL=http://www.farnell.com/datasheets/1442180.pdf?src-supplier=Element14, Connector Type="Male Pin", Contact Material=Copper, Contact Mating Length=0.236inch, Contact Plating=Gold, Gender=Male, Manufacturer Part Number=61300621121, Mount="Through Hole", Number of Contacts=6, Number of Positions=6, Number of Rows=2, Packaging=Bulk, Pitch=0.1inch, Pricing 1="1=0.54, 10=0.454, 25=0.3792, 50=0.316, 100=0.287, 1000=0.261 (USD)", REACH SVHC=Unknown, Row Spacing=0.1inch, Stock 1=2655, Supplier 1=Digi-Key, Termination=Solder
L1: "FIXED IND 2.2UH 500MA 250 MOHM", Case/Package=0603, Case Code (Metric)=1608, Current Rating=500mA, DC Resistance (DCR)=325mR, Inductance=2.2uH, Manufacturer=TDK, Manufacturer Part Number=MLZ1608A2R2WT000, Max Operating Temperature=125°C, Min Operating Temperature=-55°C, Package Quantity=4000, Saturation Current=130mA, Self Resonant Frequency=120MHz, Supplier Part Number 1=445-6385-6-ND, Test Frequency=10MHz, Tolerance=20%, Case Code (Imperial)=0603, ComponentLink1Description=https://product.tdk.com/info/en/catalog/datasheets/inductor_commercial_decoupling_mlz1608_en.pdf?src-supplier=Digi-Key, ComponentLink1URL=https://product.tdk.com/info/en/catalog/datasheets/inductor_commercial_decoupling_mlz1608_en.pdf?src-supplier=Digi-Key, Core Material=Ferrite, Height - Seated (Max)=0.037inch, Lead Free="Lead Free", Length=0.063inch, Mount="Surface Mount", Packaging="Tape and Reel", Pricing 1="1=0.17, 10=0.155, 100=0.1035, 500=0.08626, 1000=0.07245 (USD)", Shielding=Shielded, Stock 1=11492, Supplier 1=Digi-Key, Width=0.031inch
L2: "Inductor", Case/Package=0603, Case Code (Metric)=1608, Current Rating=350mA, DC Resistance (DCR)=650mR, Inductance=4.7uH, Manufacturer=TDK, Manufacturer Part Number=MLZ1608M4R7WT000, Max Operating Temperature=125°C, Min Operating Temperature=-55°C, Package Quantity=4000, Saturation Current=120mA, Self Resonant Frequency=80MHz, Supplier Part Number 1=445-6390-6-ND, Test Frequency=2MHz, Tolerance=20%, Case Code (Imperial)=0603, ComponentLink1Description=https://product.tdk.com/info/en/catalog/datasheets/inductor_commercial_decoupling_mlz1608_en.pdf?src-supplier=Digi-Key, ComponentLink1URL=https://product.tdk.com/info/en/catalog/datasheets/inductor_commercial_decoupling_mlz1608_en.pdf?src-supplier=Digi-Key, Core Material=Ferrite, Height - Seated (Max)=0.037inch, Length=0.063inch, Mount="Surface Mount", Packaging="Tape and Reel", Pricing 1="1=0.17, 10=0.155, 100=0.1035, 500=0.08626, 1000=0.07245 (USD)", Shielding=Shielded, Stock 1=1557, Supplier 1=Digi-Key, Width=0.031inch
R1 R16: "RES SMD 1M OHM 1% 1/16W 0402", Case/Package=0402, Case Code (Metric)=1005, Manufacturer=Yageo, Manufacturer Part Number=RC0402FR-071ML, Max Operating Temperature=155°C, Min Operating Temperature=-55°C, Power Rating=63mW, Resistance=1MR, Supplier Part Number 1=311-1.00MLRCT-ND, Temperature Coefficient=100ppm/°C, Tolerance=1%, Voltage Rating=50V, Case Code (Imperial)=0402, ComponentLink1Description=http://www.farnell.com/datasheets/1018594.pdf?src-supplier=Element14, ComponentLink1URL=http://www.farnell.com/datasheets/1018594.pdf?src-supplier=Element14, ComponentLink2Description=http://www.yageo.com/documents/recent/PYu-RC0402_51_RoHS_L_6_r.pdf?src-supplier=Future+Electronics, ComponentLink2URL=http://www.yageo.com/documents/recent/PYu-RC0402_51_RoHS_L_6_r.pdf?src-supplier=Future+Electronics, ComponentLink3Description=http://www.farnell.com/datasheets/2167052.pdf?src-supplier=Element14, ComponentLink3URL=http://www.farnell.com/datasheets/2167052.pdf?src-supplier=Element14, Composition="Thick Film", Depth=0.5mm, Height=0.32mm, Lead Free="Lead Free", Length=1mm, Military Standard=Not, Packaging="Tape and Reel", Pricing 1="1=0.1, 10=0.016, 100=0.0064, 1000=0.00289, 2500=0.00251, 5000=0.00207 (USD)", REACH SVHC=Unknown, Stock 1=10014545, Supplier 1=Digi-Key, Termination=SMD/SMT
R2 R3: "RES SMD 0 OHM JUMPER 1/16W 0402", Case/Package=0402, Case Code (Metric)=1005, Manufacturer=Yageo, Manufacturer Part Number=RC0402JR-070RL, Max Operating Temperature=155°C, Max Power Dissipation=63mW, Min Operating Temperature=-55°C, Package Quantity=1, Power Rating=62.5mW, Resistance=0mR, Supplier Part Number 1=311-0.0JRDKR-ND, Temperature Coefficient=200ppm/°C, Tolerance=5%, Voltage Rating=50V, Case Code (Imperial)=0402, ComponentLink1Description=http://www.yageo.com/documents/recent/PYu-RC_Group_51_RoHS_L_10.pdf?src-supplier=Digi-Key, ComponentLink1URL=http://www.yageo.com/documents/recent/PYu-RC_Group_51_RoHS_L_10.pdf?src-supplier=Digi-Key, ComponentLink2Description=http://www.yageo.com/documents/recent/PYu-RC0402_51_RoHS_L_6.pdf?src-supplier=Avnet+Europe, ComponentLink2URL=http://www.yageo.com/documents/recent/PYu-RC0402_51_RoHS_L_6.pdf?src-supplier=Avnet+Europe, ComponentLink3Description=http://www.farnell.com/datasheets/1018594.pdf?src-supplier=Element14, ComponentLink3URL=http://www.farnell.com/datasheets/1018594.pdf?src-supplier=Element14, ComponentLink4Description=https://www.verical.com/server-webapp/html/getDatasheet?partID=326379&src-supplier=Verical, ComponentLink4URL=https://www.verical.com/server-webapp/html/getDatasheet?partID=326379&src-supplier=Verical, ComponentLink5Description=http://www.farnell.com/datasheets/2167052.pdf?src-supplier=Element14, ComponentLink5URL=http://www.farnell.com/datasheets/2167052.pdf?src-supplier=Element14, Composition="Thick Film", Contact Plating=Tin,Matte, Depth=0.5mm, Features="Moisture Resistant", Height=0.016inch, Lead Free="Lead Free", Length=1mm, Military Standard=Not, Number of Terminations=2, Packaging="Tape and Reel", Pricing 1="1=0.1, 10=0.013, 25=0.0092, 50=0.0072, 100=0.0053, 250=0.004, 500=0.0032, 1000=0.00236, 5000=0.00169 (USD)", Radiation Hardening=No, REACH SVHC=Unknown, Stock 1=50001357, Supplier 1=Digi-Key, Termination=SMD/SMT, Width=0.02inch
R4: "RES SMD 453K OHM 1% 1/16W 0402", Case/Package=0402, Case Code (Metric)=1005, Manufacturer=Yageo, Manufacturer Part Number=RC0402FR-07453KL, Max Operating Temperature=155°C, Max Power Dissipation=63mW, Min Operating Temperature=-55°C, Power Rating=62.5mW, Resistance=453kR, Supplier Part Number 1=YAG3164DKR-ND, Temperature Coefficient=100ppm/°C, Tolerance=1%, Voltage Rating=50V, Case Code (Imperial)=0402, ComponentLink1Description=http://www.yageo.com/documents/recent/PYu-RC0402_51_RoHS_L_6_r.pdf?src-supplier=Future+Electronics, ComponentLink1URL=http://www.yageo.com/documents/recent/PYu-RC0402_51_RoHS_L_6_r.pdf?src-supplier=Future+Electronics, ComponentLink2Description=https://www.verical.com/server-webapp/html/getDatasheet?partID=325135&src-supplier=Verical, ComponentLink2URL=https://www.verical.com/server-webapp/html/getDatasheet?partID=325135&src-supplier=Verical, ComponentLink3Description=http://www.yageo.com/documents/recent/PYu-RC0402_51_RoHS_L_6.pdf?src-supplier=Avnet, ComponentLink3URL=http://www.yageo.com/documents/recent/PYu-RC0402_51_RoHS_L_6.pdf?src-supplier=Avnet, ComponentLink4Description=http://www.yageo.com/documents/recent/PYu-RC0402_51_RoHS_L_6.pdf?src-supplier=Avnet+Europe, ComponentLink4URL=http://www.yageo.com/documents/recent/PYu-RC0402_51_RoHS_L_6.pdf?src-supplier=Avnet+Europe, Composition="Thick Film", Contact Plating=Tin,Matte, Depth=0.5mm, Features="Moisture Resistant", Height=0.016inch, Lead Free="Lead Free", Length=1mm, Military Standard=Not, Number of Terminations=2, Packaging="Tape and Reel", Pricing 1="1=0.1, 10=0.016, 100=0.0064, 1000=0.00289, 2500=0.00251, 5000=0.00207 (USD)", Stock 1=641723, Supplier 1=Digi-Key, Termination=SMD/SMT, Voltage Rating (DC)=50V, Width=0.02inch
R5 R6 R7 R8 R11: "RES SMD 100K OHM 1% 1/16W 0402", Case/Package=0402, Case Code (Metric)=1005, Manufacturer=Yageo, Manufacturer Part Number=RC0402FR-07100KL, Max Operating Temperature=155°C, Max Power Dissipation=63mW, Min Operating Temperature=-55°C, Package Quantity=1, Resistance=100kR, Supplier Part Number 1=311-100KLRCT-ND, Temperature Coefficient=100ppm/°C, Tolerance=1%, Voltage Rating=50V, Case Code (Imperial)=0402, ComponentLink1Description=http://www.yageo.com/documents/recent/PYu-RC_Group_51_RoHS_L_10.pdf?src-supplier=Digi-Key, ComponentLink1URL=http://www.yageo.com/documents/recent/PYu-RC_Group_51_RoHS_L_10.pdf?src-supplier=Digi-Key, ComponentLink2Description=http://www.farnell.com/datasheets/1018594.pdf?src-supplier=Element14, ComponentLink2URL=http://www.farnell.com/datasheets/1018594.pdf?src-supplier=Element14, ComponentLink3Description=http://www.yageo.com/documents/recent/PYu-RC_Group_51_RoHS_L_9.pdf?src-supplier=Verical, ComponentLink3URL=http://www.yageo.com/documents/recent/PYu-RC_Group_51_RoHS_L_9.pdf?src-supplier=Verical, ComponentLink4Description=http://www.yageo.com/documents/recent/PYu-RC_Group_51_RoHS_L_9.pdf?src-supplier=Mouser, ComponentLink4URL=http://www.yageo.com/documents/recent/PYu-RC_Group_51_RoHS_L_9.pdf?src-supplier=Mouser, ComponentLink5Description=http://documents.rs-components.com/techlib://itc_doclist_GB.htm?stockno=6185797&src-supplier=RSComponents, ComponentLink5URL=http://documents.rs-components.com/techlib://itc_doclist_GB.htm?stockno=6185797&src-supplier=RSComponents, Composition="Thick Film", Depth=0.5mm, Features="Moisture Resistant", Height=0.016inch, LatestRevisionDate=17-Jul-2002, LatestRevisionNote="Re-released for DXP Platform.", Lead Free="Lead Free", Length=0.039inch, Military Standard=Not, Number of Terminations=2, PackageDescription="Axial Device, Thru-Hole; 2 Leads; 0.3 in Pin Spacing", PackageReference=AXIAL-0.3, Packaging="Tape and Reel", Power Rating=63mW, Pricing 1="1=0.1, 10=0.016, 100=0.0064, 1000=0.00289, 2500=0.00251, 5000=0.00207 (USD)", Published=8-Jun-2000, Publisher="Altium Limited", REACH SVHC="No SVHC", Stock 1=46714463, Supplier 1=Digi-Key, Termination=SMD/SMT, Width=0.02inch, Working Voltage=50V
R9: "RES SMD 1.6M OHM 5% 1/16W 0402", Case/Package=0402, Case Code (Metric)=1005, Manufacturer=Yageo, Manufacturer Part Number=RC0402JR-071M6L, Max Operating Temperature=155°C, Max Power Dissipation=63mW, Min Operating Temperature=-55°C, Resistance=1.6MR, Supplier Part Number 1=YAG3284DKR-ND, Temperature Coefficient=100ppm/°C, Tolerance=5%, Case Code (Imperial)=0402, ComponentLink1Description=http://www.yageo.com/documents/recent/PYu-RC0402_51_RoHS_L_6.pdf?src-supplier=Avnet, ComponentLink1URL=http://www.yageo.com/documents/recent/PYu-RC0402_51_RoHS_L_6.pdf?src-supplier=Avnet, ComponentLink2Description=http://www.yageo.com/documents/recent/PYu-RC0402_51_RoHS_L_6.pdf?src-supplier=Avnet+Europe, ComponentLink2URL=http://www.yageo.com/documents/recent/PYu-RC0402_51_RoHS_L_6.pdf?src-supplier=Avnet+Europe, Composition="Thick Film", Contact Plating=Tin,Matte, Depth=0.5mm, Features="Moisture Resistant", Height=0.016inch, Length=0.039inch, Military Standard=Not, Number of Terminations=2, Packaging="Tape and Reel", Pricing 1="1=0.1, 10=0.013, 100=0.0053, 1000=0.00236, 2500=0.00205, 5000=0.00169 (USD)", Radiation Hardening=No, Stock 1=10969, Supplier 1=Digi-Key, Width=0.02inch
R10: "RES SMD 180K OHM 5% 1/16W 0402", Case/Package=0402, Case Code (Metric)=1005, Manufacturer=Yageo, Manufacturer Part Number=RC0402JR-07180KL, Max Operating Temperature=155°C, Max Power Dissipation=63mW, Min Operating Temperature=-55°C, Package Quantity=1, Resistance=180kR, Supplier Part Number 1=311-180KJRDKR-ND, Temperature Coefficient=100ppm/°C, Tolerance=5%, Voltage Rating=50V, Case Code (Imperial)=0402, ComponentLink1Description=http://www.farnell.com/datasheets/1018594.pdf?src-supplier=Farnell, ComponentLink1URL=http://www.farnell.com/datasheets/1018594.pdf?src-supplier=Farnell, ComponentLink2Description=http://www.yageo.com/documents/recent/PYu-RC0402_51_RoHS_L_6_r.pdf?src-supplier=Future+Electronics, ComponentLink2URL=http://www.yageo.com/documents/recent/PYu-RC0402_51_RoHS_L_6_r.pdf?src-supplier=Future+Electronics, ComponentLink3Description=http://www.farnell.com/datasheets/1018594.pdf?src-supplier=Element14, ComponentLink3URL=http://www.farnell.com/datasheets/1018594.pdf?src-supplier=Element14, ComponentLink4Description=http://www.yageo.com/documents/recent/PYu-RC_Group_51_RoHS_L_9.pdf?src-supplier=Digi-Key, ComponentLink4URL=http://www.yageo.com/documents/recent/PYu-RC_Group_51_RoHS_L_9.pdf?src-supplier=Digi-Key, ComponentLink5Description=http://www.yageo.com.tw/exep/pages/download/literatures/PYu-R_INT-thick_7.pdf?src-supplier=Digi-Key, ComponentLink5URL=http://www.yageo.com.tw/exep/pages/download/literatures/PYu-R_INT-thick_7.pdf?src-supplier=Digi-Key, Composition="Thick Film", Depth=0.5mm, Features="Moisture Resistant", Height=0.016inch, Lead Free="Lead Free", Length=1mm, Military Standard=Not, Number of Pins=2, Number of Terminations=2, Packaging="Tape and Reel", Power Rating=63mW, Pricing 1="1=0.1, 10=0.013, 100=0.0053, 1000=0.00236, 2500=0.00205, 5000=0.00169 (USD)", REACH SVHC=Unknown, Stock 1=33910, Supplier 1=Digi-Key, Termination=SMD/SMT, Voltage Rating (DC)=50V, Width=0.5mm
R12: "RES SMD 10K OHM 1% 1/16W 0402", Case/Package=0402, Case Code (Metric)=1005, Manufacturer=Yageo, Manufacturer Part Number=RC0402FR-0710KL, Max Operating Temperature=155°C, Min Operating Temperature=-55°C, Power Rating=62.5mW, Resistance=10kR, Supplier Part Number 1=311-10.0KLRCT-ND, Temperature Coefficient=100ppm/°C, Tolerance=1%, Voltage Rating=50V, Case Code (Imperial)=0402, ComponentLink1Description=http://www.farnell.com/datasheets/2167052.pdf?src-supplier=Element14, ComponentLink1URL=http://www.farnell.com/datasheets/2167052.pdf?src-supplier=Element14, ComponentLink2Description=http://www.farnell.com/datasheets/1686128.pdf?src-supplier=Element14, ComponentLink2URL=http://www.farnell.com/datasheets/1686128.pdf?src-supplier=Element14, ComponentLink3Description=http://www.farnell.com/datasheets/1784430.pdf?src-supplier=Element14, ComponentLink3URL=http://www.farnell.com/datasheets/1784430.pdf?src-supplier=Element14, ComponentLink4Description=http://www.yageo.com/documents/recent/PYu-RC_Group_51_RoHS_L_9.pdf?src-supplier=Mouser, ComponentLink4URL=http://www.yageo.com/documents/recent/PYu-RC_Group_51_RoHS_L_9.pdf?src-supplier=Mouser, Composition="Thick Film", Depth=0.5mm, Height=0.32mm, Lead Free="Lead Free", Lead Pitch=0.2mm, Length=1mm, Military Standard=Not, Number of Pins=2, Number of Terminations=2, Packaging="Tape and Reel", Pricing 1="1=0.1, 10=0.016, 100=0.0064, 1000=0.00289, 2500=0.00251, 5000=0.00207 (USD)", REACH SVHC="No SVHC", Stock 1=49944724, Supplier 1=Digi-Key, Termination=SMD/SMT, Voltage Rating (DC)=50V, Width=0.5mm, Working Voltage=50V
R13 R15: "RES SMD 1K OHM 1% 1/16W 0402", Case/Package=0402, Case Code (Metric)=1005, Manufacturer=Yageo, Manufacturer Part Number=RC0402FR-071KL, Max Operating Temperature=155°C, Min Operating Temperature=-55°C, Power Rating=62.5mW, Resistance=1kR, Supplier Part Number 1=311-1.00KLRCT-ND, Temperature Coefficient=100ppm/°C, Tolerance=1%, Voltage Rating=50V, Case Code (Imperial)=0402, ComponentLink1Description=http://documents.rs-components.com/techlib://itc_doclist_GB.htm?stockno=6186122&src-supplier=RSComponents, ComponentLink1URL=http://documents.rs-components.com/techlib://itc_doclist_GB.htm?stockno=6186122&src-supplier=RSComponents, ComponentLink2Description=http://www.mouser.com/ds/2/447/PYu-RC0402_51_RoHS_L_6_r-8721.pdf?src-supplier=Mouser, ComponentLink2URL=http://www.mouser.com/ds/2/447/PYu-RC0402_51_RoHS_L_6_r-8721.pdf?src-supplier=Mouser, ComponentLink3Description=http://www.yageo.com/documents/recent/PYu-RC0402_51_RoHS_L_6_r.pdf?src-supplier=Future+Electronics, ComponentLink3URL=http://www.yageo.com/documents/recent/PYu-RC0402_51_RoHS_L_6_r.pdf?src-supplier=Future+Electronics, ComponentLink4Description=http://www.farnell.com/datasheets/1018594.pdf?src-supplier=Element14, ComponentLink4URL=http://www.farnell.com/datasheets/1018594.pdf?src-supplier=Element14, ComponentLink5Description=http://www.farnell.com/datasheets/2167052.pdf?src-supplier=Element14, ComponentLink5URL=http://www.farnell.com/datasheets/2167052.pdf?src-supplier=Element14, Composition="Thick Film", Depth=0.5mm, Height=0.32mm, Lead Free="Lead Free", Length=1mm, Military Standard=Not, Number of Pins=2, Packaging="Tape and Reel", Pricing 1="1=0.1, 10=0.016, 100=0.0064, 1000=0.00289, 2500=0.00251, 5000=0.00207 (USD)", REACH SVHC=Unknown, Stock 1=39206337, Supplier 1=Digi-Key, Termination=SMD/SMT, Voltage Rating (DC)=50V, Width=0.5mm
R14: "RES SMD 470K OHM 5% 1/16W 0402", Case/Package=0402, Case Code (Metric)=1005, Manufacturer=Yageo, Manufacturer Part Number=RC0402JR-07470KL, Max Operating Temperature=155°C, Max Power Dissipation=63mW, Min Operating Temperature=-55°C, Package Quantity=10000, Power Rating=62.5mW, Resistance=470kR, Supplier Part Number 1=311-470KJRDKR-ND, Temperature Coefficient=100ppm/°C, Tolerance=5%, Voltage Rating=50V, Case Code (Imperial)=0402, ComponentLink1Description=http://www.yageo.com/documents/recent/PYu-RC_Group_51_RoHS_L_10.pdf?src-supplier=Digi-Key, ComponentLink1URL=http://www.yageo.com/documents/recent/PYu-RC_Group_51_RoHS_L_10.pdf?src-supplier=Digi-Key, ComponentLink2Description=http://www.farnell.com/datasheets/2167052.pdf?src-supplier=Element14, ComponentLink2URL=http://www.farnell.com/datasheets/2167052.pdf?src-supplier=Element14, ComponentLink3Description=http://www.yageo.com/documents/recent/PYu-RC_Group_51_RoHS_L_9.pdf?src-supplier=Digi-Key, ComponentLink3URL=http://www.yageo.com/documents/recent/PYu-RC_Group_51_RoHS_L_9.pdf?src-supplier=Digi-Key, ComponentLink4Description=http://www.mouser.com/ds/2/447/PYu-RC0402_51_RoHS_L_6_r-8721.pdf?src-supplier=Mouser, ComponentLink4URL=http://www.mouser.com/ds/2/447/PYu-RC0402_51_RoHS_L_6_r-8721.pdf?src-supplier=Mouser, Composition="Thick Film", Depth=0.5mm, Features="Moisture Resistant", Height=0.016inch, Lead Free="Lead Free", Length=1mm, Military Standard=Not, Number of Terminations=2, Packaging="Tape and Reel", Pricing 1="1=0.1, 10=0.013, 100=0.0053, 1000=0.00236, 2500=0.00205, 5000=0.00169 (USD)", REACH SVHC="No SVHC", Stock 1=1646167, Supplier 1=Digi-Key, Termination=SMD/SMT, Width=0.02inch, Working Voltage=50V
SW1 SW2: library part PTS810SJK250SMTRLFS, Case/Package=SMD/SMT, Color=White, Current Rating=50mA, Manufacturer="ITT C&K", Max Operating Temperature=85°C, Min Operating Temperature=-40°C, Operating Force=260gf, Package Quantity=2900, Supplier Part Number 1=CKN10503DKR-ND, Voltage Rating (DC)=16V, Actuator Type=Standard, ComponentLink1Description=https://www.ckswitches.com/media/1476/pts810.pdf?src-supplier=Digi-Key, ComponentLink1URL=https://www.ckswitches.com/media/1476/pts810.pdf?src-supplier=Digi-Key, Contact Plating=Silver, Depth=4.6mm, Illumination Type=Non-Illuminated, Lead Free="Lead Free", Length=3.2mm, Manufacturer Part Number=PTS810SJK250SMTRLFS, Max Current Rating=50mA, Mechanical Life=50000Cycles, Mount="Surface Mount", Orientation=Straight, Packaging="Tape and Reel", Pricing 1="1=0.3, 10=0.287, 25=0.2768, 50=0.267, 100=0.2521, 250=0.23728, 500=0.2274, 1000=0.17302 (USD)", Stock 1=40646, Supplier 1=Digi-Key, Switch Function=Off-Mom, Switch Travel=0.15mm, Termination=J-Bend, Throw Configuration=SPST
SW3: library part 450404015514, "MINI SPDT SLIDE SWITCH 6.7 X 2.7 MM  / PINS 4-9 ARE MOUNTING", Manufacturer="Wurth Electronics", Supplier Part Number 1=732-13665-6-ND, ComponentLink1Description=digikey, ComponentLink1URL=https://www.digikey.ca/product-detail/en/w-rth-elektronik/450404015514/732-13665-1-ND/9950835, Manufacturer Part Number=450404015514, Pricing 1="1=0.75, 25=0.7212, 50=0.688, 250=0.622, 1500=0.5461 (USD)", Stock 1=2610, Supplier 1=Digi-Key